# Altium PCB ArrayDiodeBoard.PcbDoc
Units mm, origin at the board's own origin, x right, y up, seen from the top; angles counter-clockwise.
Board outline 19.05 x 32.38 mm, 2 copper layers (Top Layer, Bottom Layer); 1 components, 2 nets, 9 pads, 0 vias.
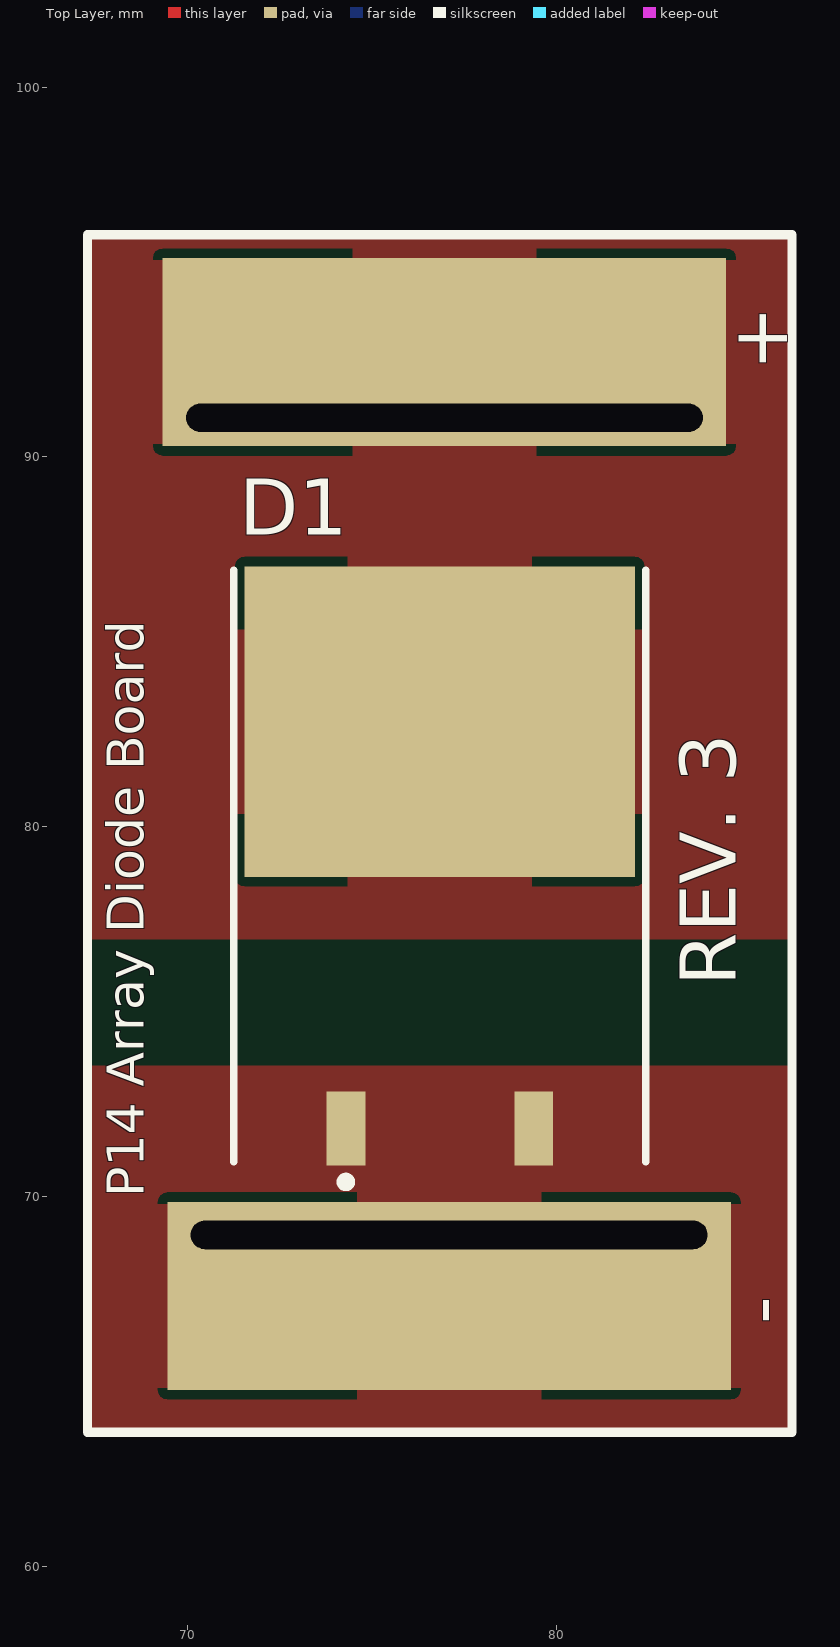
[diagram p0: Top Layer view]
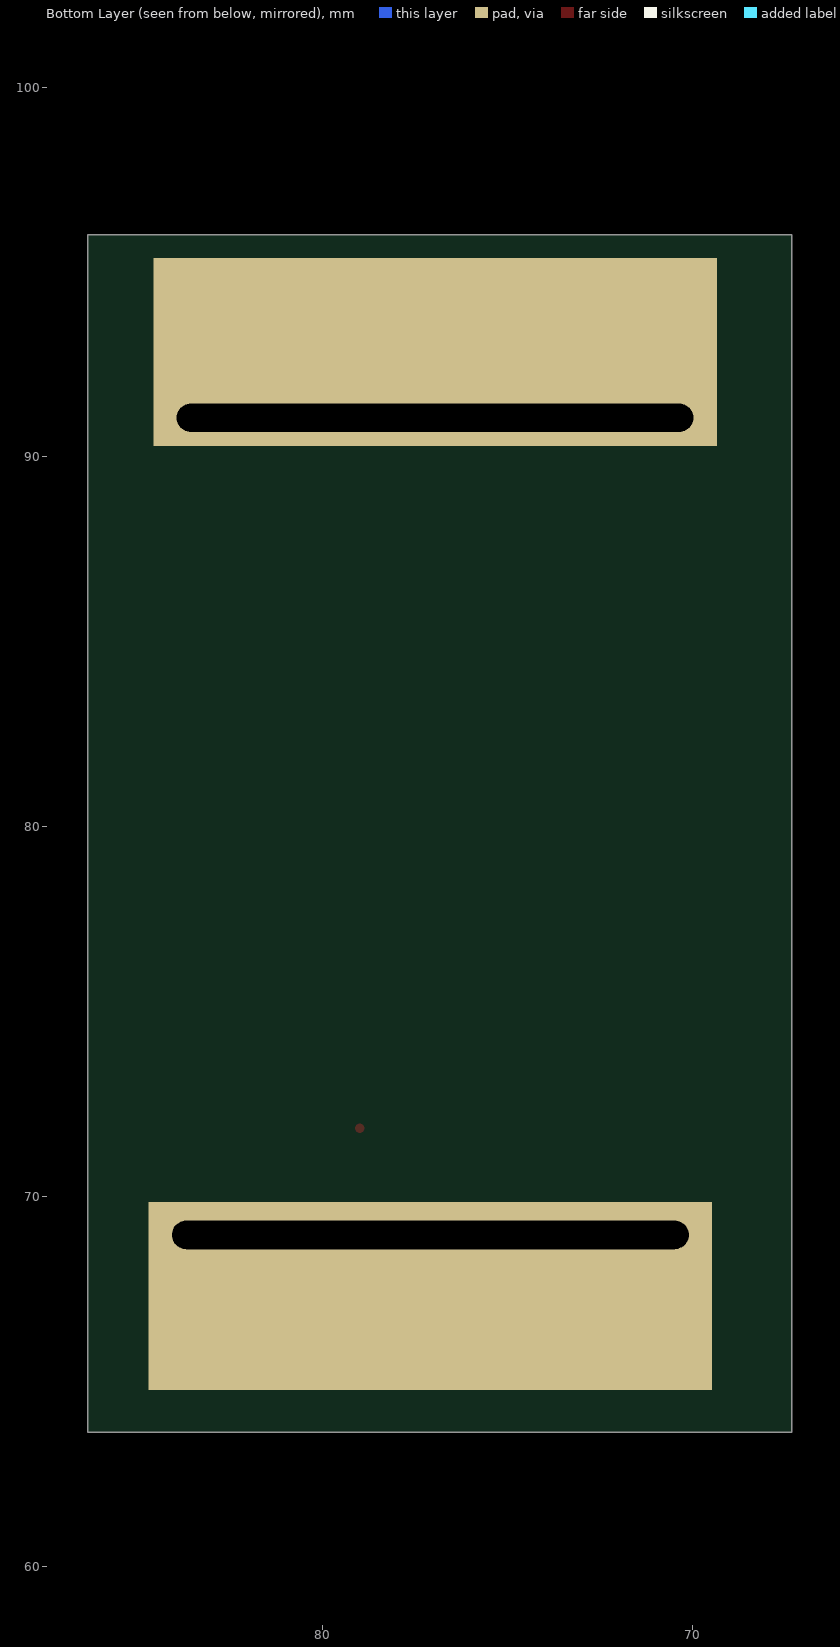
[diagram p1: Bottom Layer view, seen from below]

## Layer stack, top to bottom
Top Solder: solder mask 0.0102, Solder Resist, Dk 3.5
Top Layer: signal copper 0.0356
Dielectric 1: dielectric 0.32, FR-4, Dk 4.8
Bottom Layer: signal copper 0.0356
Bottom Solder: solder mask 0.0102, Solder Resist, Dk 3.5

## Board outline
67.31,63.627 86.36,63.627 86.36,96.012 67.31,96.012

## Design rules (kind name [scope] priority, off if disabled: settings)
Clearance [All] p1: gap=0.254 ignorepadtopadclearanceinfootprint=FALSE except(0: Arc-Hole Track-Hole SMDPad-Hole THPad-Hole Via-Hole Fill-Hole Poly-Hole Region-Hole Text-Hole)
PlaneConnect [All] p1: planeconnectstyle=Relief reliefexpansion=0.508 reliefentries=4 reliefconductorwidth=1.27 reliefairgap=0.254
PolygonConnect [All] p1: connectstyle=Relief reliefconductorwidth=5 reliefentries=4 polygonreliefangle="90 Angle" airgapwidth=0.254
RoutingVias [All] p1: holewidth=0.711 width=1.27 viastyle="Through Hole" minholewidth=0.711 minwidth=1.27 maxholewidth=0.711 maxwidth=1.27
SolderMaskExpansion [All] p1: expansion=0.102
Width [All] p1: maxlimit=0.254 minlimit=0.254 preferedwidth=0.254
29 further rules are at their usual default settings.

## Components (designator, comment, footprint, x,y, rotation, side; value= is the part's Value field where it differs from the comment)
D1 "SM74611KTTR" D2PAK 76.835,77.343 r0 top

## Footprints (in the part's own frame and the unit in brackets; to place one, negate y for a bottom-side part, rotate by r counter-clockwise, add the part's x,y. Pads: shape width x height; smd on the part's side, far side on the other; paste and mask are expansions set on the pad)
D2PAK [mm]
  rect 1.05x2 smd: 1(-2.54,-5.5) 3(2.54,-5.5)
  rect 10.55x8.4 smd: 2(0,5.5)
  silkscreen extent -5.58,-7.07 5.58,9.6, body extent -4.91,-5.64 4.91,8.94, height 4.22

## Part data
D1: library part "Active Array Diode SM74611KTTR"

## Free pads (board coordinates)
  rect 15.24x5.08 all layers, no hole: 0(76.962,92.837) 1(77.089,67.31)
  rect 15.494x5.334 on Top Solder: 0(76.962,92.837) 1(77.089,67.31)
  rrect50% 14.986x1.524 hole 0.762 slot 13.97 at 0 deg: 2(76.962,91.059) 2(77.089,68.961)

## Nets (pads, with @x,y where several pads share a name; then routed paths per layer and width w, separated by ;. In a path a pad name is that pad's centre, name@x,y a point inside that pad or via, vN(x,y) a via of type N, cw(c..) or ccw(c..) an arc to the next point about the centre after c; other vN are vias at no path point)
NEG: D1.1 D1.3 pad.1@77.089,67.31 pad.2@77.089,68.961 | length 0
POS: D1.2 pad.0@76.962,92.837 pad.2@76.962,91.059

## Polygon pours and split planes (outlines as drawn)
POS on Top Layer "Pos" (solid, pour order 18): 67.31,96.012 86.36,96.012 86.36,76.962 67.31,76.962
NEG on Top Layer "Neg" (solid, pour order 16): 67.31,73.533 86.36,73.533 86.36,63.627 67.31,63.627

## Silkscreen, mask and mechanical layers (free items; w line width, h text height)
Top Overlay:
  the board outline again, w0.254
  text "+" at 86.233,92.329 h1.52 r90
  text "REV. 3" at 84.836,75.692 h1.52 r90
  text "P14 Array Diode Board" at 68.834,69.977 h1 r90
  text "-" at 86.233,66.548 h1.52 r90